# Altium PCB PressureADC.PcbDoc
Units mm, origin at the board's own origin, x right, y up, seen from the top; angles counter-clockwise.
Board outline 73 x 19 mm, 2 copper layers (Top Layer, Bottom Layer); 35 components, 23 nets, 114 pads, 14 vias.
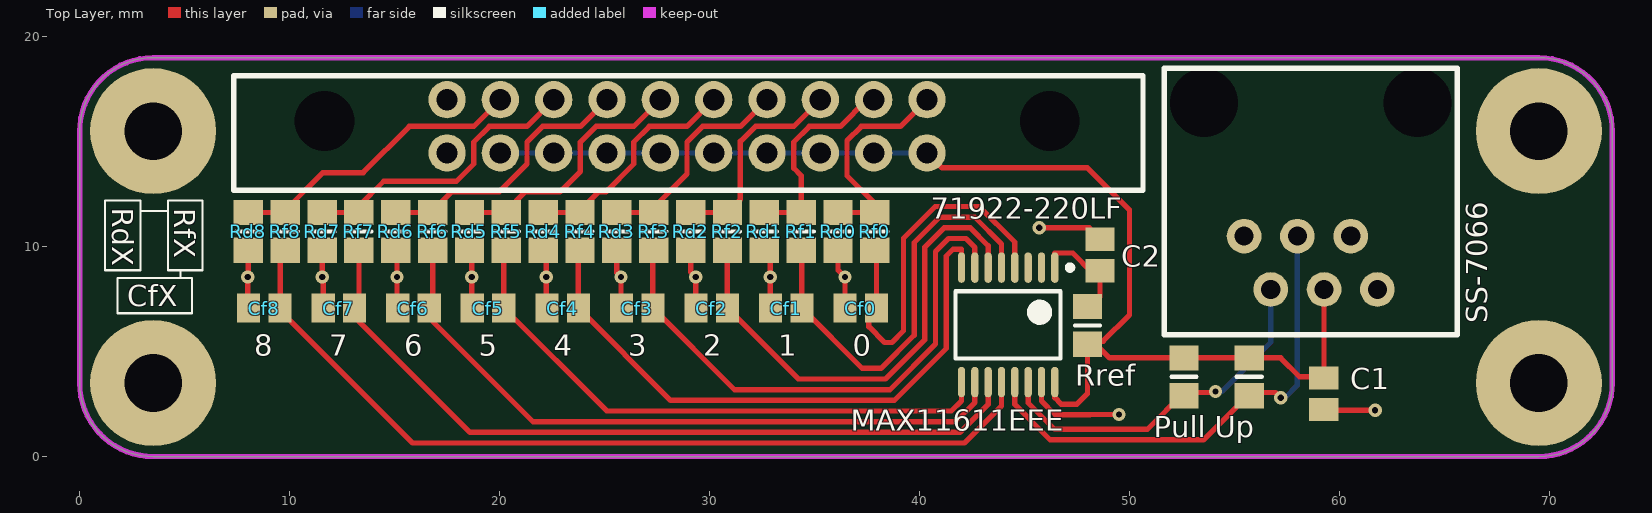
[diagram p0: Top Layer view]
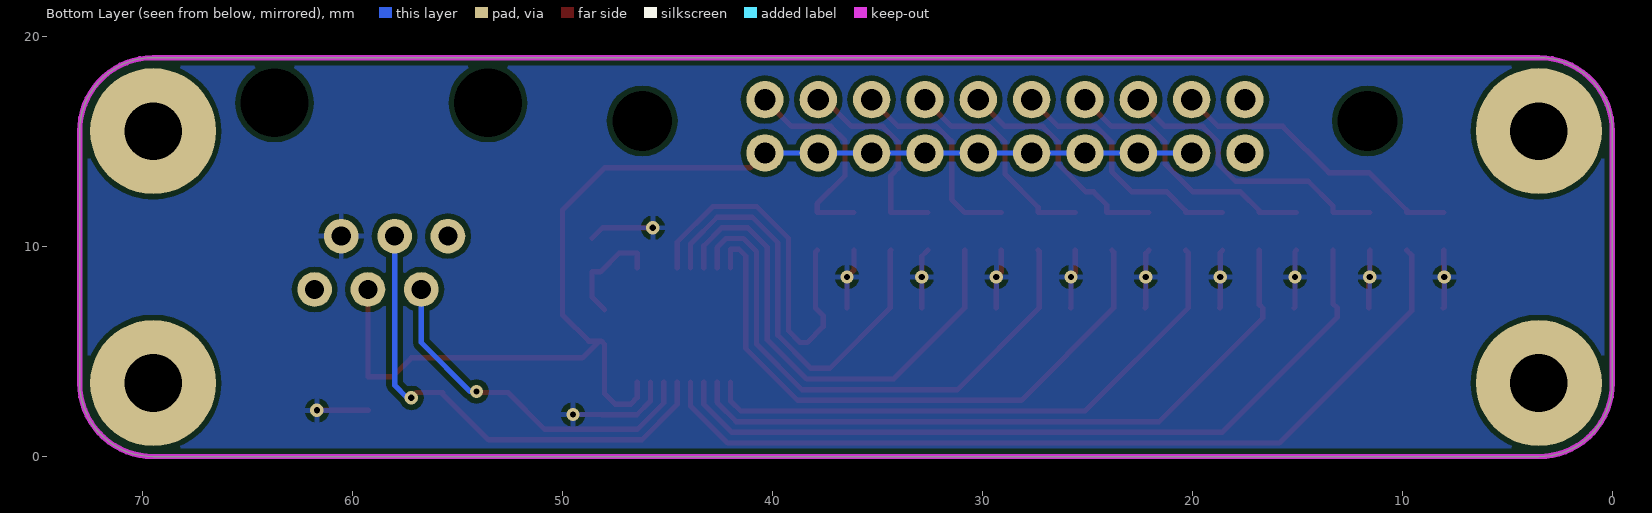
[diagram p1: Bottom Layer view, seen from below]

## Layer stack, top to bottom
Top Solder: solder mask 0.0102, Solder Resist, Dk 3.5
Top Layer: signal copper 0.0356
Dielectric 1: dielectric 0.32, FR-4, Dk 4.8
Bottom Layer: signal copper 0.0356
Bottom Solder: solder mask 0.0102, Solder Resist, Dk 3.5

## Board outline
0,3.5 0,15.5 cw(c3.5,15.5) 3.5,19 69.5,19 cw(c69.5,15.5) 73,15.5 73,3.5 cw(c69.5,3.5) 69.5,0 3.5,0 cw(c3.5,3.5)

## Design rules (kind name [scope] priority, off if disabled: settings)
Clearance [All] p1: gap=0.254 ignorepadtopadclearanceinfootprint=FALSE except(0: Arc-Hole Track-Hole SMDPad-Hole THPad-Hole Via-Hole Fill-Hole Poly-Hole Region-Hole Text-Hole)
HoleSize [All] p1: absolutevalues=TRUE maxlimit=3.5 minlimit=0.025 maxpercent=80.000 minpercent=20.000
MinimumSolderMaskSliver [All] p1: minsoldermaskwidth=0.1
PolygonConnect [All] p1: connectstyle=Relief reliefconductorwidth=0.254 reliefentries=4 polygonreliefangle="90 Angle" airgapwidth=0.254
RoutingVias [All] p1: holewidth=0.711 width=1.27 viastyle="Through Hole" minholewidth=0.711 minwidth=1.27 maxholewidth=0.711 maxwidth=1.27
SilkToSilkClearance [All] p1: silktosilkclearance=0.1
SilkToSolderMaskClearance [IsPad] p1: minsilkscreentomaskgap=0.1 clearancetoexposedcopper=TRUE
SolderMaskExpansion [All] p1: expansion=0.102
Width [All] p1: maxlimit=0.254 minlimit=0.254 preferedwidth=0.254
26 further rules are at their usual default settings.

## Classes and differential pairs
component class PressureADC: 71922-220LF C1 C2 Cf0 Cf1 Cf2 Cf3 Cf4 Cf5 Cf6 Cf7 Cf8 MAX11611EEE "Pull Up" Rd0 Rd1 Rd2 Rd3 Rd4 Rd5 Rd6 Rd7 Rd8 Rf0 Rf1 Rf2 Rf3 Rf4 Rf5 Rf6 Rf7 Rf8 Rref

## Components (designator, comment, footprint, x,y, rotation, side; value= is the part's Value field where it differs from the comment)
71922-220LF "*" 71922-220LF 40.36,17 r180 top
C1 "Cap 0.1uF" C0805 59.25,3 r270 top value=0.1F
C2 "Cap 0.1uF" C0805 48.6,9.6 r270 top value=0.1F
Cf0 "Cap 0.1uF" C0805 37.2,7.075 r180 top value=0.1F
Cf1 "Cap 0.1uF" C0805 33.65,7.075 r180 top value=0.1F
Cf2 "Cap 0.1uF" C0805 30.1,7.075 r180 top value=0.1F
Cf3 "Cap 0.1uF" C0805 26.55,7.075 r180 top value=0.1F
Cf4 "Cap 0.1uF" C0805 23,7.075 r180 top value=0.1F
Cf5 "Cap 0.1uF" C0805 19.45,7.075 r180 top value=0.1F
Cf6 "Cap 0.1uF" C0805 15.9,7.075 r180 top value=0.1F
Cf7 "Cap 0.1uF" C0805 12.35,7.075 r180 top value=0.1F
Cf8 "Cap 0.1uF" C0805 8.8,7.075 r180 top value=0.1F
MAX11611EEE "*" MAX11611EEE+ 44.222,6.275 r270 top
"Pull Up" "Res 10K" 6-0805_N 52.6,3.8 r90 top value=10K
Rd0 "Res 10K" 6-0805_N 36.12,10.725 r90 top value=10K
Rd1 "Res 10K" 6-0805_N 32.609,10.725 r90 top value=10K
Rd2 "Res 10K" 6-0805_N 29.099,10.725 r90 top value=10K
Rd3 "Res 10K" 6-0805_N 25.588,10.725 r90 top value=10K
Rd4 "Res 10K" 6-0805_N 22.077,10.725 r90 top value=10K
Rd5 "Res 10K" 6-0805_N 18.567,10.725 r90 top value=10K
Rd6 "Res 10K" 6-0805_N 15.056,10.725 r90 top value=10K
Rd7 "Res 10K" 6-0805_N 11.546,10.725 r90 top value=10K
Rd8 "Res 10K" 6-0805_N 8.035,10.725 r90 top value=10K
Rf0 "Res 33K" 6-0805_N 37.875,10.725 r270 top value=33K
Rf1 "Res 33K" 6-0805_N 34.364,10.725 r270 top value=33K
Rf2 "Res 33K" 6-0805_N 30.854,10.725 r270 top value=33K
Rf3 "Res 33K" 6-0805_N 27.343,10.725 r270 top value=33K
Rf4 "Res 33K" 6-0805_N 23.833,10.725 r270 top value=33K
Rf5 "Res 33K" 6-0805_N 20.322,10.725 r270 top value=33K
Rf6 "Res 33K" 6-0805_N 16.811,10.725 r270 top value=33K
Rf7 "Res 33K" 6-0805_N 13.301,10.725 r270 top value=33K
Rf8 "Res 33K" 6-0805_N 9.79,10.725 r270 top value=33K
Rref "Res 33K" 6-0805_N 48,6.25 r270 top value=33K
SS-7066 "*" SS-7066-NF 63.715,16.85 r180 top (schematic designator SS-7066-NF)
? "Res 10K" 6-0805_N 55.7,3.8 r90 top value=10K

## Footprints (in the part's own frame and the unit in brackets; to place one, negate y for a bottom-side part, rotate by r counter-clockwise, add the part's x,y. Pads: shape width x height; smd on the part's side, far side on the other; paste and mask are expansions set on the pad)
6-0805_N [mm] "Chip Resistor, Body 2.0x1.2mm, IPC Medium Density"
  rect 1.2x1.4 smd: 1(-0.9,0) 2(0.9,0)
  silkscreen extent 0,-0.6 0,0.6, body extent -1.07,-0.7 1.07,0.7, height 0.7
71922-220LF [mil] "Analog connector"
  round 70 hole 40: 1(0,0) 2(0,100) 3(100,0) 4(100,100) 5(200,0) 6(200,100) 7(300,0) 8(300,100) 9(400,0) 10(400,100) 11(500,0) 12(500,100) 13(600,0) 14(600,100) 15(700,0) 16(700,100) 17(800,0) 18(800,100) 19(900,0) 20(900,100)
  round 0 hole 112: ""(-230,40) ""(1130,40)
  silkscreen extent -405,-45 1300,170, body extent -428,-907 1332,148, height 346
C0805 [mm] "Chip Capacitor, Body 2.0x1.3mm, IPC High Density"
  rect 1.1x1.4 smd: 1(-0.75,0) 2(0.75,0)
  body extent -1.1,-0.72 1.1,0.72, height 1.4
MAX11611EEE+ [mm] "ADC with I2C interface"
  oval 1.45x0.35 smd mask+0.05: 1(-2.725,2.222) 2(-2.725,1.587) 3(-2.725,0.952) 4(-2.725,0.317) 5(-2.725,-0.318) 6(-2.725,-0.953) 7(-2.725,-1.588) 8(-2.725,-2.223) 9(2.725,-2.222) 10(2.725,-1.587) 11(2.725,-0.952) 12(2.725,-0.317) 13(2.725,0.318) 14(2.725,0.953) 15(2.725,1.588) 16(2.725,2.223)
  silkscreen extent -2.85,-2.5 1.6,3.07, body extent -3,-2.5 3,2.5, height 1.73
SS-7066-NF [mil]
  round 65 hole 36: 1(75,350) 2(125,250) 3(175,350) 4(225,250) 5(275,350) 6(325,250)
  round 0 hole 128: ""(0,0) ""(400,0)
  silkscreen extent -75,-65 475,435, body extent -55,-309 465,399, height 466

## Part data
71922-220LF: library part 71922-220LF, "Flat cable connector", Supplier Part Number 1=609-3526-ND, Supplier 1=Digi-Key
C1 C2 Cf0 Cf1 Cf2 Cf3 Cf4 Cf5 Cf6 Cf7 Cf8: "Capacitor 0.1uF", Supplier Part Number 1=478-1395-1-ND, LatestRevisionDate=29-May-2009, LatestRevisionNote="IPC-7351 Footprint Added.", PackageDescription="Chip Capacitor", PackageReference=C1206, Published=8-Jun-2000, Publisher="Altium Limited", Supplier 1=Digi-Key
MAX11611EEE: library part MAX11611EEE, "ADC with I2C interface", Supplier Part Number 1=MAX11611EEE+-ND, Supplier 1=Digi-Key
"Pull Up" Rd0 Rd1 Rd2 Rd3 Rd4 Rd5 Rd6 Rd7 Rd8 ?: "Resistor 10K", Supplier Part Number 1=311-10.0KCRCT-ND, LatestRevisionDate=29-May-2009, LatestRevisionNote="IPC-7351 Footprint Added.", PackageDescription="Chip Resistor", PackageReference=J1-0603, Published=8-Jun-2000, Publisher="Altium Limited", Supplier 1=Digi-Key
Rf0 Rf1 Rf2 Rf3 Rf4 Rf5 Rf6 Rf7 Rf8 Rref: "Resistor 33K", Supplier Part Number 1=311-33.0KHRCT-ND, LatestRevisionDate=29-May-2009, LatestRevisionNote="IPC-7351 Footprint Added.", PackageDescription="Chip Resistor", PackageReference=J1-0603, Published=8-Jun-2000, Publisher="Altium Limited", Supplier 1=Digi-Key
SS-7066: library part SS-7066-NF, "RJ12 Connector", Supplier Part Number 1=380-1043-ND, Supplier 1=Digi-Key

## Free pads (board coordinates)
  round 6 hole 2.75: 1(3.5,3.5) 1(3.5,15.5) 1(69.5,3.5) 1(69.5,15.5)

## Via types
v1: diameter 0.635, hole 0.3, Top Layer to Bottom Layer, 14 vias

## Nets (pads, with @x,y where several pads share a name; then routed paths per layer and width w, separated by ;. In a path a pad name is that pad's centre, name@x,y a point inside that pad or via, vN(x,y) a via of type N, cw(c..) or ccw(c..) an arc to the next point about the centre after c; other vN are vias at no path point)
Analog0: Cf0.1 MAX11611EEE.4 Rf0.2 | length 18.3
  Top Layer w0.254: Rf0.2 37.95,9.75 Cf0.1 37.586,6.711 37.586,6.189 38.341,5.434 38.684,5.434 39.242,5.992 39.242,10.397 40.752,11.907 42.842,11.907 44.54,10.209 MAX11611EEE.4
Analog1: Cf1.1 MAX11611EEE.5 Rf1.2 | length 20.7
  Top Layer w0.254: Rf1.2 34.4,9.789 Cf1.1 37.275,4.2 38.168,4.2 39.75,5.782 39.75,10.187 40.962,11.399 42.631,11.399 43.905,10.125 MAX11611EEE.5
Analog2: Cf2.1 MAX11611EEE.6 Rf2.2 | length 23.5
  Top Layer w0.254: Rf2.2 30.85,9.821 Cf2.1 34.233,3.692 38.379,3.692 40.258,5.571 40.258,9.976 41.173,10.891 42.421,10.891 43.27,10.042 MAX11611EEE.6
Analog3: Cf3.1 MAX11611EEE.7 Rf3.2 | length 26.4
  Top Layer w0.254: Rf3.2 27.3,9.782 Cf3.1 31.191,3.184 38.589,3.184 40.766,5.361 40.766,9.766 41.383,10.383 42.21,10.383 42.635,9.958 MAX11611EEE.7
Analog4: Cf4.1 MAX11611EEE.8 Rf4.2 | length 29.3
  Top Layer w0.254: Rf4.2 23.75,9.742 Cf4.1 28.149,2.676 38.8,2.676 41.274,5.15 41.274,9.556 41.593,9.875 42,9.875 MAX11611EEE.8
Analog5: Cf5.1 MAX11611EEE.9 Rf5.2 | length 27.7
  Top Layer w0.254: Rf5.2 20.2,9.703 Cf5.1 25.107,2.168 41.512,2.168 42,2.656 MAX11611EEE.9
Analog6: Cf6.1 MAX11611EEE.10 Rf6.2 | length 32.7
  Top Layer w0.254: Rf6.2 16.811,7.236 Cf6.1 16.65,6.6 21.59,1.66 41.722,1.66 42.635,2.573 MAX11611EEE.10
Analog7: Cf7.1 MAX11611EEE.11 Rf7.2 | length 37.3
  Top Layer w0.254: Rf7.2 13.301,7.276 Cf7.1 13.1,6.65 18.598,1.152 41.933,1.152 43.27,2.489 MAX11611EEE.11
Analog8: Cf8.1 MAX11611EEE.12 Rf8.2 | length 41.8
  Top Layer w0.254: Rf8.2 9.55,9.585 Cf8.1 9.55,6.95 15.856,0.644 42.143,0.644 43.905,2.406 MAX11611EEE.12
GND: C1.2 C2.1 Cf0.2 Cf1.2 Cf2.2 Cf3.2 Cf4.2 Cf5.2 Cf6.2 Cf7.2 Cf8.2 MAX11611EEE.15 Rd0.1 Rd1.1 Rd2.1 Rd3.1 Rd4.1 Rd5.1 Rd6.1 Rd7.1 Rd8.1 SS-7066.2 | length 35.8
  Top Layer w0.254: Rd8.1 8.035,8.585 v1(8,8.55) 8,7.125 Cf8.2 ; Rd7.1 11.556,9.814 v1(11.556,8.55) 11.6,8.506 Cf7.2 ; Rd6.1 15.112,9.769 v1(15.112,8.55) 15.112,7.112 Cf6.2 ; Rd5.1 18.669,9.723 v1(18.669,8.55) 18.669,7.106 Cf5.2 ; Rd4.1 22.225,9.677 v1(22.225,8.55) 22.225,7.1 Cf4.2 ; Rd3.1 25.588,8.743 v1(25.781,8.55) 25.781,7.094 Cf3.2 ; Rd2.1 29.099,8.789 v1(29.337,8.55) 29.35,8.538 Cf2.2 ; Rd1.1 32.894,9.54 v1(32.894,8.55) 32.894,7.081 Cf1.2 ; Rd0.1 36.12,8.88 v1(36.45,8.55) Cf0.2 ; v1(45.7,10.9) 48.1,10.9 C2.1@48.6,10.4 ; MAX11611EEE.15 45.81,2.647 46.465,1.992 48.11,1.992 48.118,2 v1(49.5,2) ; C1.2@59.25,2.2 v1(61.7,2.2)
Net71922-220LF_1: 71922-220LF.1 Rd0.2 Rf0.1 | length 10.3
  Top Layer w0.254: Rd0.2 Rf0.1 37.875,12.05 36.55,13.375 36.55,15.05 37.23,15.73 39.09,15.73 71922-220LF.1
Net71922-220LF_3: 71922-220LF.3 Rd1.2 Rf1.1 | length 10.3
  Top Layer w0.254: Rd1.2 Rf1.1 34.364,13.381 34.01,13.735 34.01,14.986 34.754,15.73 36.23,15.73 37.5,17 71922-220LF.3 71922-220LF.3@37.82,16.589
Net71922-220LF_5: 71922-220LF.5 Rd2.2 Rf2.1 | length 10
  Top Layer w0.254: Rd2.2 Rf2.1 31.47,12.241 31.47,15.012 32.188,15.73 34.01,15.73 71922-220LF.5
Net71922-220LF_7: 71922-220LF.7 Rd3.2 Rf3.1 | length 10.4
  Top Layer w0.254: Rd3.2 Rf3.1 27.343,11.868 28.93,13.455 28.93,14.986 29.674,15.73 31.47,15.73 71922-220LF.7
Net71922-220LF_9: 71922-220LF.9 Rd4.2 Rf4.1 | length 11.2
  Top Layer w0.254: Rd4.2 Rf4.1 24.081,11.625 24.081,11.981 24.706,12.606 25.062,12.606 26.39,13.934 26.39,14.986 27.134,15.73 28.93,15.73 71922-220LF.9
Net71922-220LF_11: 71922-220LF.11 Rd5.2 Rf5.1 | length 12.2
  Top Layer w0.254: Rd5.2 Rf5.1 20.322,11.709 21.22,12.606 22.881,12.606 23.85,13.575 23.85,14.986 24.594,15.73 26.39,15.73 71922-220LF.11
Net71922-220LF_13: 71922-220LF.13 Rd6.2 Rf6.1 | length 13
  Top Layer w0.254: Rd6.2 Rf6.1 16.811,11.709 17.709,12.606 19.982,12.606 21.31,13.934 21.31,14.986 22.054,15.73 23.85,15.73 71922-220LF.13
Net71922-220LF_15: 71922-220LF.15 Rd7.2 Rf7.1 | length 14.1
  Top Layer w0.254: Rd7.2 Rf7.1 13.301,11.932 14.483,13.114 17.95,13.114 18.77,13.934 18.77,14.986 19.514,15.73 21.31,15.73 71922-220LF.15
Net71922-220LF_17: 71922-220LF.17 Rd8.2 Rf8.1 | length 14.3
  Top Layer w0.254: Rd8.2 Rf8.1 9.79,11.733 11.582,13.525 13.5,13.525 15.705,15.73 18.77,15.73 71922-220LF.17
NetC2_2: C2.2 MAX11611EEE.1 Rref.1 | length 5.3
  Top Layer w0.254: MAX11611EEE.1 46.445,9.695 47.3,9.695 48.195,8.8 48.6,8.8 48.6,7.6 Rref.1@48,7
SCL: ?.1 MAX11611EEE.13 SS-7066.4 | length 23.7
  Top Layer w0.254: MAX11611EEE.13 44.54,2.48 46.227,0.794 53.53,0.794 55.7,2.963 55.7,3.05 56.95,3.05 v1(57.2,2.8)
  Bottom Layer w0.254: v1(57.2,2.8) 57.4,2.8 58,3.4 SS-7066.4
SDA: "Pull Up.1" MAX11611EEE.14 SS-7066.5 | length 17.3
  Top Layer w0.254: MAX11611EEE.14 45.175,2.564 46.437,1.302 50.851,1.302 52.6,3.05 54.05,3.05 v1(54.1,3.1)
  Bottom Layer w0.254: v1(54.1,3.1) 54.4,3.1 56.73,5.43 SS-7066.5
VCC: 71922-220LF.2 71922-220LF.4 71922-220LF.6 71922-220LF.8 71922-220LF.10 71922-220LF.12 71922-220LF.14 71922-220LF.16 71922-220LF.18 "Pull Up.2" ?.2 C1.1 MAX11611EEE.16 Rref.2 SS-7066.3 | length 59.5
  Top Layer w0.254: 71922-220LF.2 41.07,13.75 48,13.75 50,11.75 50,6.75 48.75,5.5 Rref.2@48.25,5.5 ; MAX11611EEE.16 46.445,2.805 46.75,2.5 47.5,2.5 48,3 Rref.2 48.15,5.5 Rref.2@48.25,5.5 ; SS-7066.3 59.27,3.82 59.25,3.8 58.1,3.8 57.2,4.7 ?.2 52.6,4.7 49.05,4.7 Rref.2@48.25,5.5
  Bottom Layer w0.254: 71922-220LF.18 71922-220LF.16 71922-220LF.14 71922-220LF.12 71922-220LF.10 71922-220LF.8 71922-220LF.6 71922-220LF.4 71922-220LF.2
pads on no net: 71922-220LF. 71922-220LF.19 71922-220LF.20 MAX11611EEE.2 MAX11611EEE.3 SS-7066. SS-7066.1 SS-7066.6

## Polygon pours and split planes (outlines as drawn)
GND on Bottom Layer "GND" (solid, pour order 2): 0,3.5 0,15.5 cw(c3.5,15.5) 3.5,19 69.5,19 cw(c69.5,15.5) 73,15.5 73,3.5 cw(c69.5,3.5) 69.5,0 3.5,0 cw(c3.5,3.5)

## Keep-outs
Keep-Out Layer:
  the board outline again, w0.254

## Silkscreen, mask and mechanical layers (free items; w line width, h text height)
Top Overlay:
  lines w0.1: 2.9,11.7 4.2,11.7 ; 4.8,8.5 4.8,8.85 ; 1.2,8.875 2.9,8.875 2.9,12.2 1.2,12.2 1.2,8.875 ; 1.8,6.825 1.8,8.5 5.35,8.5 5.35,6.825 1.8,6.825 ; 4.2,8.875 4.2,12.2 5.85,12.2 5.85,8.875 4.2,8.875
  text "RdX" at 1.55,11.85 h1 r270
  text "RfX" at 4.5,11.825 h1 r270
  text "CfX" at 2.275,7.15 h1
  text "8" at 8.325,4.8 h1
  text "7" at 11.887,4.8 h1
  text "6" at 15.45,4.8 h1
  text "5" at 19.012,4.8 h1
  text "4" at 22.575,4.8 h1
  text "3" at 26.137,4.8 h1
  text "2" at 29.7,4.8 h1
  text "1" at 33.262,4.8 h1
  text "0" at 36.825,4.8 h1